# Altium PCB CTENLEDDRVR.PcbDoc
Units mm, origin at the board's own origin, x right, y up, seen from the top; angles counter-clockwise.
Board outline 90 x 15 mm, 2 copper layers (Top Layer, Bottom Layer); 11 components, 11 nets, 33 pads, 78 vias.
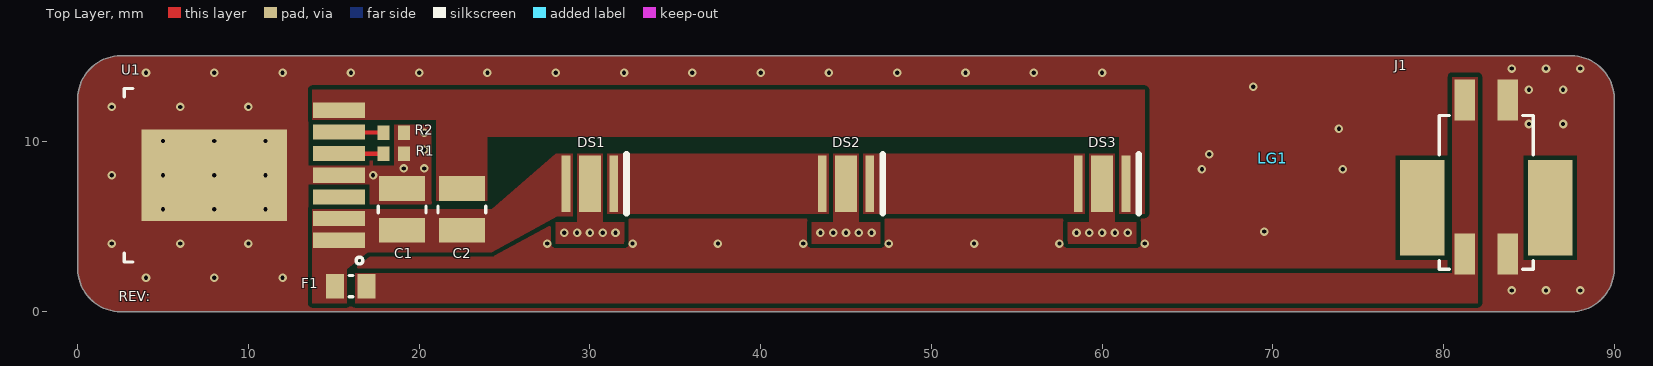
[diagram p0: Top Layer view]
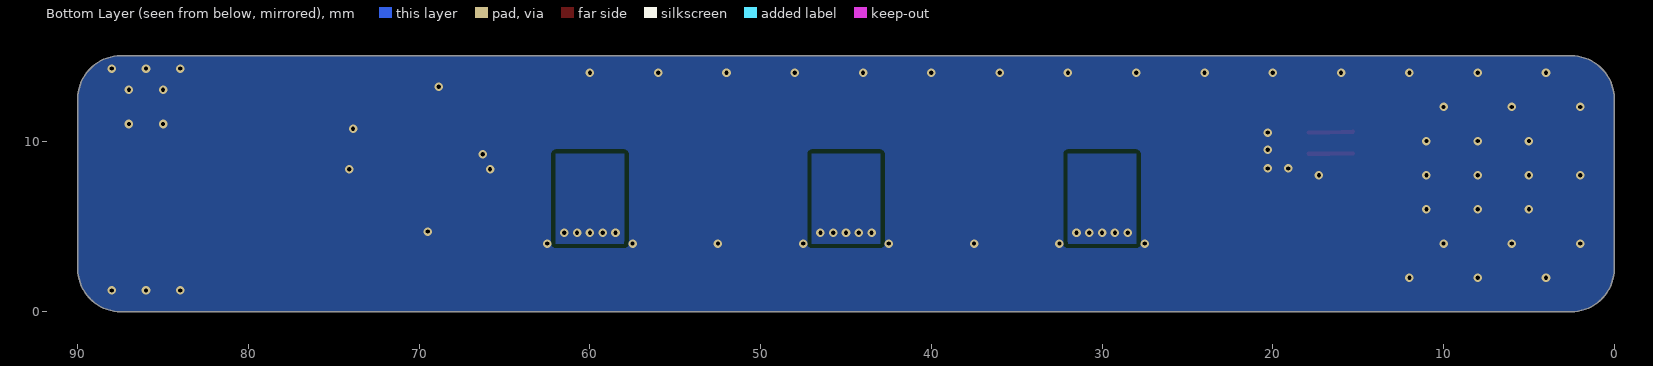
[diagram p1: Bottom Layer view, seen from below]

## Layer stack, top to bottom
Top Solder: solder mask 0.0102, Solder Resist, Dk 3.5
Top Layer: signal copper 0.0356
Dielectric 1: dielectric 0.32, FR-4, Dk 4.8
Bottom Layer: signal copper 0.0356
Bottom Solder: solder mask 0.0102, Solder Resist, Dk 3.5

## Board outline
0,12.46 cw(c2.54,12.46) 2.54,15 87.46,15 cw(c87.46,12.46) 90,12.46 90,2.54 cw(c87.46,2.54) 87.46,0 2.54,0 cw(c2.54,2.54) 0,2.54

## Design rules (kind name [scope] priority, off if disabled: settings)
Clearance [All] p1: gap=0.254 ignorepadtopadclearanceinfootprint=FALSE except(0: Arc-Hole Track-Hole SMDPad-Hole THPad-Hole Via-Hole Fill-Hole Poly-Hole Region-Hole Text-Hole)
MinimumSolderMaskSliver [All] p1: minsoldermaskwidth=0
PolygonConnect PolygonConnect_2 [All vs IsNamedPolygon('GND_L01_P008')] p1: thpad.connectstyle=Relief thpad.reliefconductorwidth=0.254 thpad.reliefentries=4 thpad.polygonreliefangle="90 Angle" thpad.airgapwidth=0.254 smdpad.connectstyle=Relief smdpad.reliefconductorwidth=0.254 smdpad.reliefentries=4 smdpad.polygonreliefangle="90 Angle" smdpad.airgapwidth=0.254 via.connectstyle=Direct via.reliefconductorwidth=0.254 via.reliefentries=4 via.polygonreliefangle="90 Angle" via.airgapwidth=0.254
PolygonConnect PolygonConnect_1 [All vs IsNamedPolygon('GND_L01_P008')] p2: connectstyle=Relief reliefconductorwidth=0.254 reliefentries=4 polygonreliefangle="90 Angle" airgapwidth=0.254
PolygonConnect [All] p3: connectstyle=Direct reliefconductorwidth=0.254 reliefentries=4 polygonreliefangle="90 Angle" airgapwidth=0.254
RoutingVias [All] p1: holewidth=0.35 width=0.7 viastyle="Through Hole" minholewidth=0.15 minwidth=0.3 maxholewidth=0.5 maxwidth=1
SilkToSilkClearance [All] p1: silktosilkclearance=0
SilkToSolderMaskClearance [IsPad] p1: minsilkscreentomaskgap=0 clearancetoexposedcopper=TRUE
SolderMaskExpansion [All] p1: expansion=0.102 istentingtop=FALSE
Width [All] p1: maxlimit=0.254 minlimit=0.254 preferedwidth=0.254
27 further rules are at their usual default settings.

## Components (designator, comment, footprint, x,y, rotation, side; value= is the part's Value field where it differs from the comment)
C1 "2.2uF 100V 1210" FP-CL32-IPC_C 19,6 r90 top
C2 "2.2uF 100V 1210" FP-CL32-IPC_C 22.5,6 r90 top
DS1 "XTEAWT-E0-0000-00000BKE1" CREE-XTE-2_V 30,7.5 r0 top
DS2 "XTEAWT-E0-0000-00000BKE1" CREE-XTE-2_V 45,7.5 r0 top
DS3 "XTEAWT-E0-0000-00000BKE1" CREE-XTE-2_V 60,7.5 r0 top
F1 "F_1A_0805" RESC2013X50X30NL20T20 16,1.5 r0 top
J1 "691805010302" 691805010302 82.5,7 r0 top
LG1 "alexembedded" alexembedded-Footprint-1 70,9 r0 top
R1 "R_0R_0603" RESC1609X50X30LL8T20 18.5,9.25 r0 top
R2 "R_0R_0603" RESC1609X50X30LL8T20 18.5,10.5 r0 top
U1 "TPS92550" TPS92550-Footprint-1 8,8 r90 top

## Footprints (in the part's own frame and the unit in brackets; to place one, negate y for a bottom-side part, rotate by r counter-clockwise, add the part's x,y. Pads: shape width x height; smd on the part's side, far side on the other; paste and mask are expansions set on the pad)
691805010302 [mm] "2.50mm Screwless SMT, 2p"
  rect 1.2x2.4 smd: 1(-1.25,-3.6) 1(-1.25,5.4) 2(1.25,-3.6) 2(1.25,5.4)
  rect 2.6x5.6 smd: M1(-3.75,-0.9) M2(3.75,-0.9)
  silkscreen extent -2.75,-4.5 2.75,4.5, body extent -4.7,-4.5 4.7,6.5, height 5.1
alexembedded-Footprint-1 [mm]
CREE-XTE-2_V [mm] "SMD, 3-Leads, Body 3.45x3.45mm"
  rect 0.5x3.3 smd: 1(-1.4,0) 3(1.4,0)
  rect 1.3x3.3 smd: 2(0,0)
  silkscreen extent 2.15,-1.73 2.15,1.73, body extent -1.73,-1.73 1.73,1.73, height 2.36
FP-CL32-IPC_C [mm]
  rect 1.453x2.704 smd paste+0 mask+0: 1(-1.225,0) 2(1.225,0)
  silkscreen extent -0.2,-1.4 0.2,1.4, body extent -2.05,-1.5 2.05,1.5, height 0.25
RESC1609X50X30LL8T20 [mm] "Chip Resistor, 2-Leads, Body 1.65x0.95mm, IPC High Density"
  rect 0.7x0.85 smd: 1(-0.6,0) 2(0.6,0)
  body extent -0.82,-0.48 0.82,0.48, height 0.5
RESC2013X50X30NL20T20 [mm] "Chip Resistor, 2-Leads, Body 2.00x1.25mm, IPC Medium Density"
  rect 1.05x1.45 smd: 1(-0.925,0) 2(0.925,0)
  silkscreen extent -0.1,-0.63 0.1,0.63, body extent -1.1,-0.72 1.1,0.72, height 0.5
TPS92550-Footprint-1 [mm]
  rect 0.89x3.06 smd: 1(-3.81,-7.305) 2(-2.54,-7.305) 3(-1.27,-7.305) 4(0,-7.305) 5(1.27,-7.305) 6(2.54,-7.305) 7(3.81,-7.305)
  rect 5.35x8.54 smd: EP(0,0)
  silkscreen extent -5.2,-8.7 5.08,5.28, body extent -5.08,-8.49 5.08,5.28, height 4.78

## Part data
C1 C2: library part CMP-000022-1, "Ceramic capacitor SMD-1210 2200nF (2.2uF) /100V X7R# K +- 10% Samsung, RoHS/2k/", Capacitance=2.2uF, Case Code (Imperial)=1210, Case Code (Metric)=3225, Dielectric=X7R, Max Operating Temperature=125°C, Min Operating Temperature=-55°C, Package Quantity=1, Tolerance=10%, Voltage=100V, Case/Package=1210, Construction=Flat, Contact Plating=Tin, Depth=2.5mm, Height=2.5mm, Length=3.2mm, Mount="Surface Mount", Packaging="Tape and Reel", Radiation Hardening=No, RoHS Compliant=Yes, Series=CL, Thickness=0.106inch, Voltage Rating=100V, Width=0.098inch
DS1 DS2 DS3: library part CMP-007-00000-1, "LED Uni-Color Cool White 6500K 70 2-Pin SMD EP T/R"
F1: library part CMP-005-00000-1, "Fuse, 1A, 0805"
J1: library part CMP-1502-02888-1, "Serie 8050 - 2.50mm Screwless SMT - WR-TBL, 2 pin", Manufacturer="Wurth Elektronik", Operating Temperature=-45to130degC, Datasheet URL=http://katalog.we-online.de/em/datasheet/691805010302.pdf, Manufacturer URL=http://www.we-online.de, Mounting Technology=SMT, Package Reference=691805010302, Packaging=TapeandReel, Part Number=691805010302, Pin Number=2, Pitch=2.50mm, Publisher=WurthElektronik
LG1: library part CMP-2539-3, "alexembedded graphic"
R1 R2: library part CMP-009-00062-1, "Res, 0 Ohm, 0603"
U1: library part CMP-019-00007-3, "LED Driver IC 1 Output DC DC Regulator Step-Down (Buck) PWM Dimming 450mA TO-PMOD-7"

## Via types
v1: diameter 0.5, hole 0.25, Top Layer to Bottom Layer, tented both sides, 72 vias
v2: diameter 0.5, hole 0.25, Top Layer to Bottom Layer, tented bottom, 6 vias

## Nets (pads, with @x,y where several pads share a name; then routed paths per layer and width w, separated by ;. In a path a pad name is that pad's centre, name@x,y a point inside that pad or via, vN(x,y) a via of type N, cw(c..) or ccw(c..) an arc to the next point about the centre after c; other vN are vias at no path point)
EP1: DS1.2
  other v1: 28.5,4.625 29.25,4.625 30,4.625 30.75,4.625 31.5,4.625
EP2: DS2.2
  other v1: 43.5,4.625 44.25,4.625 45,4.625 45.75,4.625 46.5,4.625
EP3: DS3.2
  other v1: 58.5,4.625 59.25,4.625 60,4.625 60.75,4.625 61.5,4.625
GND: C1.2 J1.2 R1.2 R2.2 U1.4 U1.EP
  other v1: 84,1.25 86,1.25 88,1.25 4,2 8,2 12,2 2,4 6,4 10,4 27.5,4 32.5,4 37.5,4 42.5,4 47.5,4 52.5,4 57.5,4 62.5,4 5,6 8,6 11,6 2,8 5,8 8,8 11,8 17.3,8 19.1,8.4 20.3,8.4 20.3,9.5 5,10 8,10 11,10 20.3,10.5 85,11 87,11 2,12 6,12 10,12 85,13 87,13 4,14 8,14 12,14 16,14 20,14 24,14 28,14 32,14 36,14 40,14 44,14 48,14 52,14 56,14 60,14 84,14.25 86,14.25 88,14.25
  other v2: 69.5,4.7 65.85,8.35 74.1,8.35 66.275,9.225 73.875,10.725 68.85,13.175
LED+: C1.1 C2.1 DS1.1 F1.1 U1.1 U1.2
LED-: C2.2 DS3.3 U1.7
NetDS1_3: DS1.3 DS2.1
NetDS2_3: DS2.3 DS3.1
NetR1_1: R1.1 U1.5 | length 2.6
  Top Layer w0.254: U1.5 16.708,9.252 17.677,9.252 R1.1
NetR2_1: R2.1 U1.6 | length 2.6
  Top Layer w0.254: U1.6 16.708,10.503 17.677,10.503 R2.1
VCC: F1.2 J1.1
pads on no net: J1.M1 J1.M2 U1.3

## Polygon pours and split planes (outlines as drawn)
EP3 on Bottom Layer "EP3_L02_P010" (solid, pour order 13): 59.246,9.25 57.996,9.25 57.996,4 61.996,4 61.996,9.25 60.746,9.25
EP2 on Bottom Layer "EP2_L02_P010" (solid, pour order 10): 44.246,9.25 42.996,9.25 42.996,4 46.996,4 46.996,9.25 45.746,9.25
EP1 on Bottom Layer "EP2_L02_P010" (solid, pour order 0): 29.25,9.25 28,9.25 28,4 32,4 32,9.25 30.75,9.25
GND on Bottom Layer "GND_L02_P014" (solid, pour order 14): 2.54,0 cw(c2.54,2.54) 0,2.54 0,12.46 cw(c2.54,12.46) 2.54,15 87.46,15 cw(c87.46,12.46) 90,12.46 90,2.54 cw(c87.46,2.54) 87.46,0
EP3 on Top Layer "EP3_L01_P005" (solid, pour order 5): 59.246,9.25 59.246,5.25 57.996,5.25 57.996,4 61.996,4 61.996,5.25 60.746,5.25 60.746,9.25
EP2 on Top Layer "EP2_L01_P003" (solid, pour order 3): 44.246,9.25 44.246,5.25 42.996,5.25 42.996,4 46.996,4 46.996,5.25 45.746,5.25 45.746,9.25
EP1 on Top Layer "EP1_L01_P001" (solid, pour order 1): 29.25,9.25 29.25,5.25 28,5.25 28,4 32,4 32,5.25 30.75,5.25 30.75,9.25
GND on Top Layer "GND_L01_P012" (solid, remove dead copper, pour order 12): 2.54,0 cw(c2.54,2.54) 0,2.54 0,12.46 cw(c2.54,12.46) 2.54,15 87.46,15 cw(c87.46,12.46) 90,12.46 90,2.54 cw(c87.46,2.54) 87.46,0
LED- on Top Layer "LED-_L01_P011" (solid, pour order 11): 21,11.25 21,6.5 24,6.5 24,10.25 61,10.25 61,5.75 62.5,5.75 62.5,13 13.75,13 13.75,11.25
NetDS2_3 on Top Layer "NETDS2_3_L01_P009" (solid, pour order 9): 46,9.25 46,5.75 59,5.75 59,9.25
NetDS1_3 on Top Layer "NETDS1_3_L01_P008" (solid, pour order 8): 31,9.25 31,5.75 44,5.75 44,9.25
LED+ on Top Layer "LED+_L01_P007" (solid, pour order 7): 29,5.596 28.096,5.596 24.25,3.5 17,3.5 15.75,2.5 15.75,0.5 13.75,0.5 13.75,6 24.25,6 28,9.25 29,9.25
VCC on Top Layer "VCC_L01_P006" (solid, pour order 6): 82,13.75 80.5,13.75 80.5,2.25 16.25,2.25 16.25,0.5 82,0.5 82,2

## Silkscreen, mask and mechanical layers (free items; w line width, h text height)
Top Overlay:
  text "REV:" at 2.4,0.4 h1
Mechanical 1:
  lines w0.1: 2.54,-0.05 cw(c2.54,2.54) -0.05,2.54 -0.05,12.46 cw(c2.54,12.46) 2.539,15.05 ; 2.54,-0.05 87.46,-0.05 ccw(c87.46,2.54) 90.05,2.54 ; 2.54,-0.05 2.54,-0.05 ; 2.54,15.05 ccw(c2.54,15) 2.54,15.05 ; 2.54,15.05 ccw(c2.54,15) 2.539,15.05 ; 2.54,15.05 ccw(c2.54,12.46) 2.539,15.05 ; 2.54,15.05 87.46,15.05 cw(c87.46,12.46) 90.05,12.46 90.05,2.54 ; 90.05,2.54 90.05,2.54